# Altium PCB current-meter.PcbDoc
Units mm, origin at the board's own origin, x right, y up, seen from the top; angles counter-clockwise.
Board outline 51 x 16 mm, 2 copper layers (Top Layer, Bottom Layer), stack 1.471 mm thick; 53 components, 33 nets, 187 pads, 76 vias.
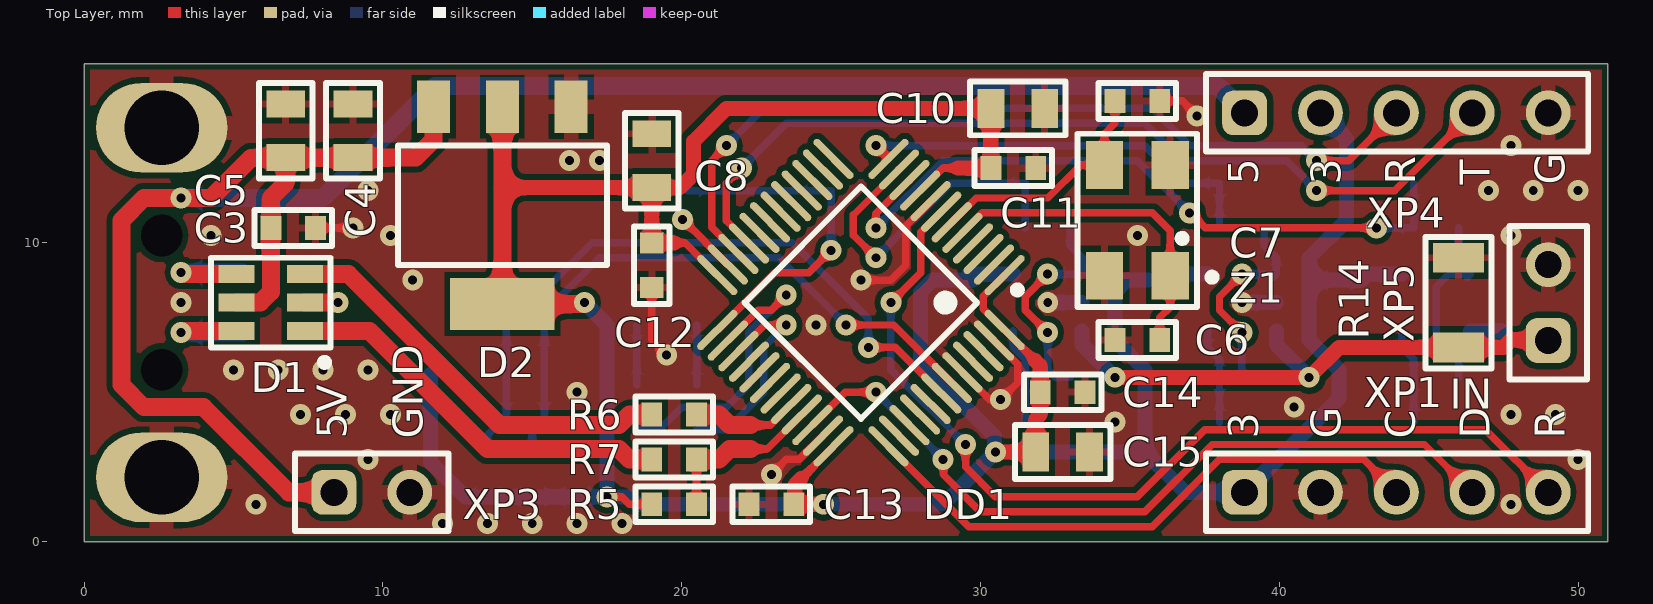
[diagram p0: Top Layer view]
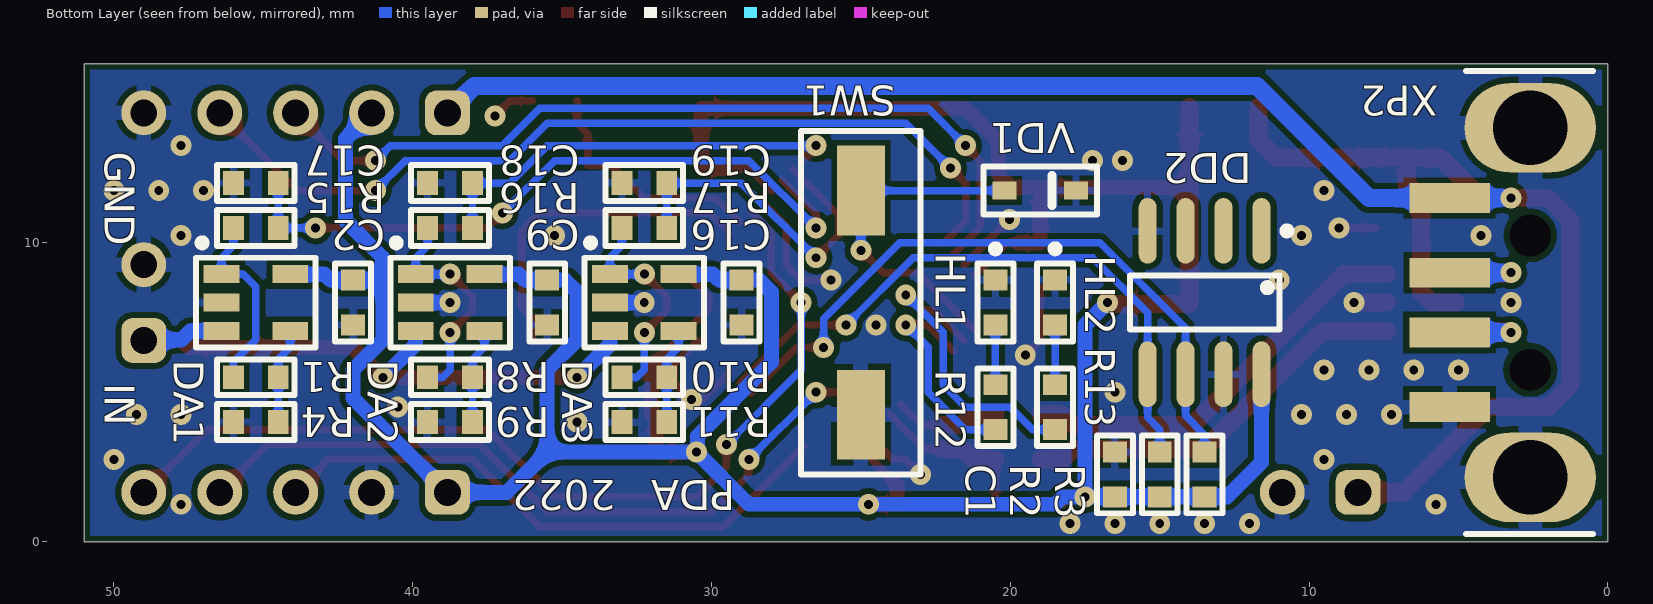
[diagram p1: Bottom Layer view, seen from below]
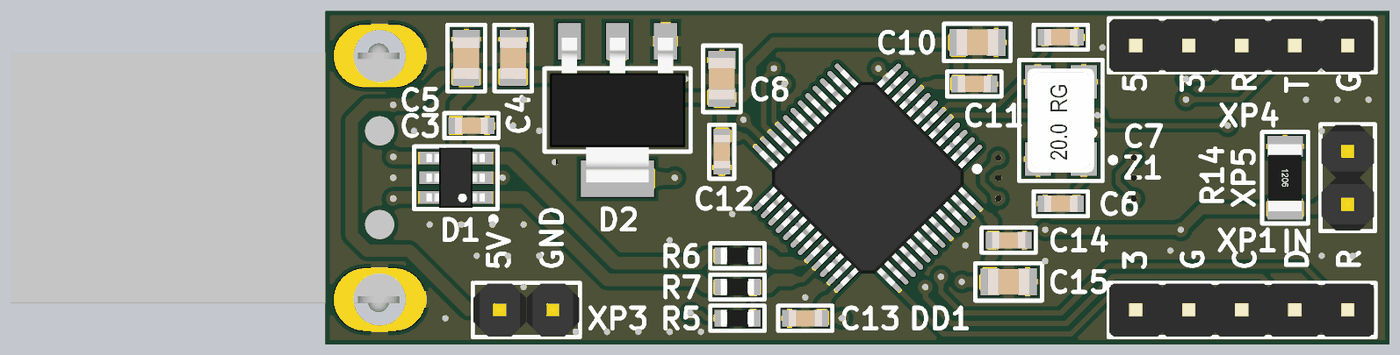
[diagram p2: 3D render of the assembled board from above, using the file's embedded part models]
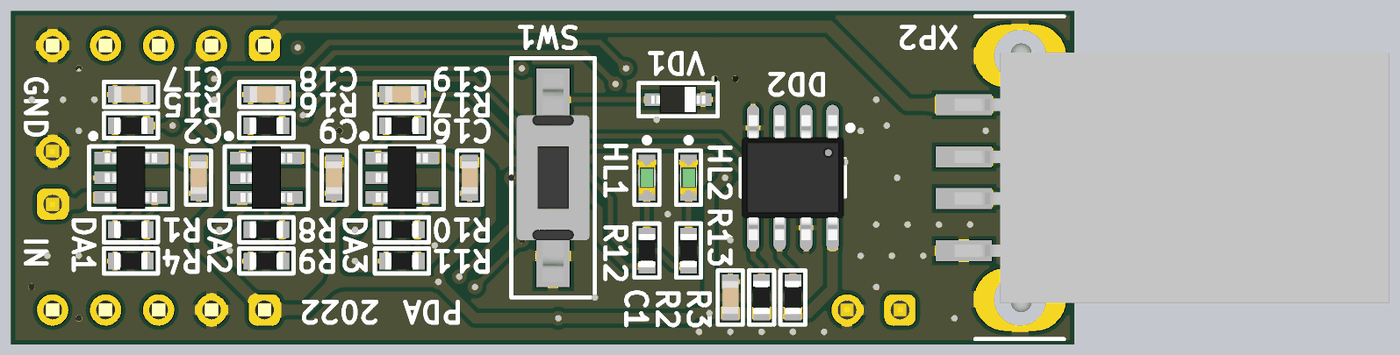
[diagram p3: 3D render of the assembled board from below, using the file's embedded part models]

## Layer stack, top to bottom
Top Solder: solder mask 0.0102, Solder Resist, Dk 3.5
Top Layer: signal copper 0.0356
Dielectric 1: dielectric 1.4, FR-4, Dk 4.8
Bottom Layer: signal copper 0.0356
Bottom Solder: solder mask 0.0102, Solder Resist, Dk 3.5

## Board outline
0,0 51,0 51,16 0,16

## Design rules (kind name [scope] priority, off if disabled: settings)
BoardOutlineClearance [All] p1: gap=0.2 ignorepadtopadclearanceinfootprint=FALSE
Clearance Clearance_r [(ObjectKind = 'Pad') And (AsMM(SolderMaskExpansion) = 1)] p1: gap=1 ignorepadtopadclearanceinfootprint=FALSE
Clearance [All] p2: gap=0.2 ignorepadtopadclearanceinfootprint=FALSE
ComponentClearance ComponentClearance_pls [(ObjectKind = 'Component') And (Footprint = 'PLS-5')] p1: gap=0 collisioncheckmode=3 verticalgap=0 showdistances=FALSE
ComponentClearance ComponentClearance_panel [(ObjectKind = '3D Body') And ((Identifier = 'panel_front') Or (Identifier = 'panel_back'))] p2: gap=0 collisioncheckmode=3 verticalgap=0 showdistances=FALSE
ComponentClearance [All] p3: gap=0.2 collisioncheckmode=3 verticalgap=0.2 showdistances=FALSE
HoleSize [All] p1: absolutevalues=TRUE maxlimit=10 minlimit=0.3 maxpercent=80.000 minpercent=20.000
MinimumSolderMaskSliver [All] p1: minsoldermaskwidth=0.15
PolygonConnect PolygonConnect_0mm5 [(ObjectKind = 'Pad') And ((AsMM(PadXSize_AllLayers) = 2.7) Or (AsMM(PadXSize_AllLayers) = 1.5) Or (AsMM(PadYSize_AllLayers) = 1.75) Or (AsMM(PadYSize_AllLayers) = 3))] p1: connectstyle=Relief reliefconductorwidth=0.5 reliefentries=4 polygonreliefangle="90 Angle" airgapwidth=0.2
PolygonConnect PolygonConnect_0mm8 [(ObjectKind = 'Pad') And (AsMM(PadXSize_AllLayers) = 3)] p2: connectstyle=Relief reliefconductorwidth=0.8 reliefentries=4 polygonreliefangle="90 Angle" airgapwidth=0.2
PolygonConnect PolygonConnect_via [IsVia] p3: connectstyle=Direct reliefconductorwidth=0.254 reliefentries=4 polygonreliefangle="90 Angle" airgapwidth=0.254
PolygonConnect [All] p4: connectstyle=Relief reliefconductorwidth=0.25 reliefentries=4 polygonreliefangle="90 Angle" airgapwidth=0.2
RoutingVias [All] p1: holewidth=0.3 width=0.7 viastyle="Through Hole" minholewidth=0.3 minwidth=0.6 maxholewidth=0.5 maxwidth=1
SolderMaskExpansion [All] p1: expansion=0.05 istentingtop=FALSE
Width [All] p1: maxlimit=5 minlimit=0.2 preferedwidth=0.2
27 further rules are at their usual default settings.

## Components (designator, comment, footprint, x,y, rotation, side; value= is the part's Value field where it differs from the comment)
C1 "0.1u" 0603-CAP 16.5,2.25 r90 bottom
C2 "0.1u" 0603-CAP 42,8 r90 bottom
C3 "0.1u" 0603-CAP 7,10.5 r0 top
C4 "4.7u" 0805-CAP 9,13.75 r90 top
C5 "4.7u" 0805-CAP 6.75,13.75 r90 top
C6 "22p" 0603-CAP 35.25,6.75 r180 top
C7 "22p" 0603-CAP 35.25,14.75 r0 top
C8 "1u" 0805-CAP 19,12.75 r90 top
C9 "0.1u" 0603-CAP 35.5,8 r90 bottom
C10 "1u" 0805-CAP 31.25,14.5 r180 top
C11 "0.01u" 0603-CAP 31.1,12.5 r180 top
C12 "0.1u" 0603-CAP 19,9.25 r90 top
C13 "0.1u" 0603-CAP 23,1.25 r0 top
C14 "0.1u" 0603-CAP 32.75,5 r180 top
C15 "4.7u" 0805-CAP 32.75,3 r180 top
C16 "0.1u" 0603-CAP 29,8 r90 bottom
C17 "0.1u" 0603-CAP 45.25,12 r0 bottom
C18 "0.1u" 0603-CAP 38.75,12 r0 bottom
C19 "0.1u" 0603-CAP 32.25,12 r0 bottom
D1 "USBLC6-2SC6" SOT-23-6L 6.25,8 r180 top
D2 "AZ1117EH-3.3" SOT-223 14,11.25 r180 top
DA1 "OPA333" SOT-23-5 45.25,8 r180 bottom
DA2 "OPA333" SOT-23-5 38.75,8 r180 bottom
DA3 "OPA333" SOT-23-5 32.25,8 r180 bottom
DD1 "STM32F103C8T6" LQFP48 26,8 r225 top
DD2 "M24C16-WMN6TP" SOIC8 13.5,8 r270 bottom
HL1 "LED" 0603-LED 20.5,8 r90 bottom
HL2 "LED" 0603-LED 18.5,8 r90 bottom
R1 "39k" 0603-RES 45.25,5.5 r0 bottom
R2 "10k" 0603-RES 15,2.25 r90 bottom
R3 "10k" 0603-RES 13.5,2.25 r90 bottom
R4 "100" 0603-RES 45.25,4 r180 bottom
R5 "1.5k" 0603-RES 19.75,1.25 r180 top
R6 "22" 0603-RES 19.75,4.25 r180 top
R7 "22" 0603-RES 19.75,2.75 r180 top
R8 "39k" 0603-RES 38.75,5.5 r0 bottom
R9 "1k" 0603-RES 38.75,4 r180 bottom
R10 "0" 0603-RES 32.25,5.5 r0 bottom
R11 "NP" 0603-RES 32.25,4 r180 bottom
R12 "1k" 0603-RES 20.5,4.5 r270 bottom
R13 "1k" 0603-RES 18.5,4.5 r270 bottom
R14 "1" 1206-RES 46,8 r270 top
R15 "1k" 0603-RES 45.25,10.5 r0 bottom
R16 "1k" 0603-RES 38.75,10.5 r0 bottom
R17 "1k" 0603-RES 32.25,10.5 r0 bottom
SW1 "PARTNUMBER" KLS7-TS3608-5.0-180 25,8 r90 bottom
VD1 "PESD5V0L1BA" SOD-323 19,11.75 r180 bottom
XP1 "SWD" PLS-5 38.84,1.65 r0 top
XP2 "USB type A" DS1098-B 0,8 r270 bottom
XP3 "NO POP" PLS-2 8.36,1.65 r0 top
XP4 "PLS-5" PLS-5 38.84,14.35 r0 top
XP5 "NO POP" PLS-2 49,6.73 r90 top
Z1 "8MHz" KX-9 35.25,10.75 r90 top

## Footprints (in the part's own frame and the unit in brackets; to place one, negate y for a bottom-side part, rotate by r counter-clockwise, add the part's x,y. Pads: shape width x height; smd on the part's side, far side on the other; paste and mask are expansions set on the pad)
0603-CAP [mm]
  rect 0.7x0.8 smd: 1(-0.75,0) 2(0.75,0)
  silkscreen extent -1.3,-0.6 1.3,0.6, body extent -0.8,-0.4 0.8,0.4, height 0.8
0603-LED [mm]
  rect 0.7x0.8 smd: 1(-0.75,0) 2(0.75,0)
  silkscreen extent -1.3,-0.6 1.92,0.6, body extent -0.8,-0.4 0.8,0.4, height 0.6
0603-RES [mm]
  rect 0.7x0.8 smd: 1(-0.75,0) 2(0.75,0)
  silkscreen extent -1.3,-0.6 1.3,0.6, body extent -0.8,-0.4 0.8,0.4, height 0.46
0805-CAP [mm]
  rect 0.9x1.3 smd: 1(-0.9,0) 2(0.9,0)
  silkscreen extent -1.6,-0.9 1.6,0.9, body extent -1,-0.62 1,0.62, height 0.7
1206-RES [mm]
  rect 1x1.7 smd: 1(-1.5,0) 2(1.5,0)
  silkscreen extent -2.2,-1.1 2.2,1.1, body extent -1.6,-0.8 1.6,0.8, height 0.6
DS1098-B [mm] "USB"
  rect 1x2.7 smd: 1(-3.5,-5.3) 2(-1,-5.3) 3(1,-5.3) 4(3.5,-5.3)
  oval 3x4.4 hole 2.5: 4(-5.85,-2.6) 4(5.85,-2.6)
  round 1 hole 1.4 unplated: ""(-2.25,-2.6) ""(2.25,-2.6)
  silkscreen extent -7.75,-4.75 7.75,-0.5, body extent -6.45,-5.75 6.45,15.1, height 3.25
KLS7-TS3608-5.0-180 [mm] "Button"
  rect 3x1.6 smd: 1(-3.75,0) 2(3.75,0)
  silkscreen extent -5.75,-2 5.75,2, body extent -5,-1.75 5,1.75, height 5
KX-9 [mm]
  rect 1.6x1.25 smd: 1(-1.85,-1.1) 2(1.85,-1.1) 3(1.85,1.1) 4(-1.85,1.1)
  silkscreen extent -2.9,-2.63 2.9,2, body extent -2.5,-1.6 2.5,1.6, height 1.01
LQFP48 [mm]
  oval 1.8x0.25 smd: 1(-4.05,2.75) 2(-4.05,2.25) 3(-4.05,1.75) 4(-4.05,1.25) 5(-4.05,0.75) 6(-4.05,0.25) 7(-4.05,-0.25) 8(-4.05,-0.75) 9(-4.05,-1.25) 10(-4.05,-1.75) 11(-4.05,-2.25) 12(-4.05,-2.75) 25(4.05,-2.75) 26(4.05,-2.25) 27(4.05,-1.75) 28(4.05,-1.25) 29(4.05,-0.75) 30(4.05,-0.25) 31(4.05,0.25) 32(4.05,0.75) 33(4.05,1.25) 34(4.05,1.75) 35(4.05,2.25) 36(4.05,2.75)
  oval 0.25x1.8 smd: 13(-2.75,-4.05) 14(-2.25,-4.05) 15(-1.75,-4.05) 16(-1.25,-4.05) 17(-0.75,-4.05) 18(-0.25,-4.05) 19(0.25,-4.05) 20(0.75,-4.05) 21(1.25,-4.05) 22(1.75,-4.05) 23(2.25,-4.05) 24(2.75,-4.05) 37(2.75,4.05) 38(2.25,4.05) 39(1.75,4.05) 40(1.25,4.05) 41(0.75,4.05) 42(0.25,4.05) 43(-0.25,4.05) 44(-0.75,4.05) 45(-1.25,4.05) 46(-1.75,4.05) 47(-2.25,4.05) 48(-2.75,4.05)
  silkscreen extent -4.12,-2.75 2.75,3.52, body extent -4.5,-4.5 4.5,4.5, height 1.6
PLS-2 [mm]
  rrect50% 1.5x1.5 hole 0.9: 1(0,0)
  round 1.5 hole 0.9: 2(2.54,0)
  silkscreen extent -1.3,-1.3 3.84,1.3, body extent -1.27,-1.27 3.81,1.27, height 8.54
PLS-5 [mm]
  rrect50% 1.5x1.5 hole 0.9: 1(0,0)
  round 1.5 hole 0.9: 2(2.54,0) 3(5.08,0) 4(7.62,0) 5(10.16,0)
  silkscreen extent -1.3,-1.3 11.5,1.3, body extent -1.27,-1.27 11.43,1.27, height 8.54
SOD-323 [mm]
  rect 0.8x0.6 smd: 1(-1.2,0) 2(1.2,0)
  silkscreen extent -1.9,-0.8 1.9,0.8, body extent -1.3,-0.67 1.3,0.68, height 1.1
SOIC8 [mm]
  oval 2.2x0.6 smd: 1(-2.4,1.905) 2(-2.4,0.635) 3(-2.4,-0.635) 4(-2.4,-1.905) 5(2.4,-1.905) 6(2.4,-0.635) 7(2.4,0.635) 8(2.4,1.905)
  silkscreen extent -2.52,-2.5 0.9,2.88, body extent -3,-2.45 3,2.45, height 1.7
SOT-23-5 [mm]
  rect 1.2x0.6 smd: 1(-1.15,0.95) 2(-1.15,0) 3(-1.15,-0.95) 4(1.15,-0.95) 5(1.15,0.95)
  silkscreen extent -2,-1.5 2,2.12, body extent -1.25,-1.5 1.25,1.5, height 1.1
SOT-23-6L [mm]
  rect 1.2x0.6 smd: 1(-1.15,0.95) 2(-1.15,0) 3(-1.15,-0.95) 4(1.15,-0.95) 5(1.15,0) 6(1.15,0.95)
  silkscreen extent -2,-1.5 2,2.12, body extent -1.4,-1.45 1.4,1.45, height 1.45
SOT-223 [mm]
  rect 1.1x1.75 smd: 1(-2.3,-3.3) 2(0,-3.3) 3(2.3,-3.3)
  rect 3.5x1.75 smd: 4(0,3.3)
  silkscreen extent -3.5,-2 3.5,2, body extent -3.25,-3.48 3.25,3.48, height 1.7

## Part data
C1 C2 C3 C4 C5 C6 C7 C8 C9 C10 C11 C12 C13 C14 C15 C16 C17 C18 C19: library part Cap, "PARTNUMBER"
D2: "AZ1117EH-3.3TRG1"
DA1 DA2 DA3: "OPA333AIDBVR (TS321ILT)"
HL1 HL2: library part LED0, "PARTNUMBER"
R1 R2 R3 R4 R5 R6 R7 R8 R9 R10 R11 R12 R13 R14 R15 R16 R17: library part Res2, "PARTNUMBER"
SW1: library part SW-PB
VD1: library part "TVS diode", "PESD5V0L1BA,115"
XP1 XP4: library part "Header 5", "PARTNUMBER"
XP2: library part "Header 4", "PARTNUMBER"
XP3 XP5: library part "Header 2", "PLS-2", Type=PLS-2
Z1: library part KX-9AT, "12.89048 (12.89007 -20+70)"

## Via types
v1: diameter 0.7, hole 0.3, Top Layer to Bottom Layer, tented both sides, 76 vias

## Nets (pads, with @x,y where several pads share a name; then routed paths per layer and width w, separated by ;. In a path a pad name is that pad's centre, name@x,y a point inside that pad or via, vN(x,y) a via of type N, cw(c..) or ccw(c..) an arc to the next point about the centre after c; other vN are vias at no path point)
3V3: C1.1 C2.2 C8.1 C9.2 C10.2 C11.2 C12.2 C13.2 C14.2 C15.2 C16.2 D2.2 D2.4 DA1.5 DA2.5 DA3.5 DD1.1 DD1.9 DD1.24 DD1.36 DD1.48 DD2.8 R2.1 R3.1 R5.2 XP1.1 XP4.2 | length 126.3
  Top Layer w0.25: v1(17.5,1.5) 18,1.5 18.25,1.25 R5.2 ; 19.75,10 20.111,10 DD1.24 ; 24,2.111 DD1.36 ; DD1.9 28.732,12.5 29.25,12.5 ; DD1.1 30.1,8.211 30.1,7.789 31.356,6.533 31.82,6.07
  Top Layer w0.5: 14,11.85 C8.1 ; 19.75,10 C12.2 C8.1 ; 24,2.111 23.789,1.9 23.789,1.289 C13.2 v1(24.75,1.25) ; 29.25,12.5 C11.2 C10.2 21.5,14.5 20.4,13.4 20.4,12.3 19.95,11.85 C8.1 ; v1(30.5,3) C15.2 31.85,4.1 32,4.25 C14.2 32,5.889 31.82,6.07
  Top Layer w0.6: D2.2 14,11.85 D2.4 v1@16.75,7.95
  Bottom Layer w0.5: DD2.8 11.595,2.655 12.75,1.5 R3.1 R2.1 C1.1 v1(17.5,1.5) ; v1(16.75,8) 17.5,7.25 v1(17.5,1.5) ; DA3.5 29.95,8.95 29.75,8.75 C16.2 28.393,8.75 28,8.357 28,6 30.472,3.528 30.472,3.028 v1(30.5,3) ; DA2.5 36.45,8.95 36.25,8.75 C9.2 34.893,8.75 34.5,8.357 34.5,6.75 35.5,5.75 35.5,3 ; XP1.1 36.85,1.65 35.5,3 ; XP1.1@38.85,1.65 42,4.8 42,5.75 41,6.75 41,8.75 ; XP4.2 42.25,13.48 42.25,10.75 41,9.5 41,8.75 ; DA1.5 42.95,8.95 42.75,8.75 C2.2 41,8.75 ; v1(17.5,1.5) 18.25,1.5 18.5,1.25 v1(24.75,1.25) 28.75,1.25 v1(30.5,3) ; v1(30.5,3) 35.5,3
5V: C3.1 C4.1 C5.1 D1.5 D2.3 XP2.1 XP3.1 XP4.1 | length 70.3
  Top Layer w0.6: D1.5 5.899,8 6.25,8.351 C3.1 6.25,11.5 6.75,12 C5.1 ; XP3.1 6.85,1.65 4,4.5 2,4.5 1.25,5.25 1.25,10.75 2,11.5 v1(3.25,11.5) 4.25,11.5 5.589,12.839 6.539,12.839 6.55,12.85 C5.1 ; D2.3 11.7,13.45 11.1,12.85 C4.1 C5.1
  Bottom Layer w0.6: v1(3.25,11.5) XP2.1 8,11.5 11.75,15.25 37.94,15.25 XP4.1
BUTTON: DD1.25 SW1.2 VD1.1 | length 11.7
  Top Layer w0.25: DD1.25 23.111,9 24.25,9 v1(25,9.75)
  Bottom Layer w0.25: VD1.1 SW1.2 v1(25,9.75)
C_INPUT: DA1.3 DA2.3 DA3.3 R14.2 XP5.1 | length 21.8
  Top Layer w0.5: v1(34.5,5.5) v1(41,5.5) 42,6.5 R14.2 47.5,6.5 47.75,6.75 48.98,6.75 XP5.1
  Bottom Layer w0.5: DA3.3 33.4,6.6 v1(34.5,5.5) ; DA2.3 39.9,6.6 v1(41,5.5) ; DA1.3 47.45,7.05 47.75,6.75 48.98,6.75 XP5.1
C_K1: C19.1 DD1.11 R17.1 | length 11.4
  Top Layer w0.25: v1(26.5,9.5) 25.75,10.25 25.75,10.932 DD1.11
  Bottom Layer w0.25: v1(26.5,9.5) 29,12 C19.1 R17.1
C_K40: C18.1 DD1.12 R16.1 | length 14.1
  Top Layer w0.25: v1(26.5,13.25) 26.93,12.82 DD1.12
  Bottom Layer w0.25: v1(26.5,13.25) 35.5,13.25 36.75,12 C18.1 R16.1
C_K400: C17.1 DD1.10 R15.1 | length 23.4
  Top Layer w0.25: v1(26.5,10.5) 26.5,10.975 DD1.10 ; v1(37,11) 37.025,11 37.525,10.5 v1(43.25,10.5)
  Bottom Layer w0.25: v1(26.5,10.5) 28.75,12.75 35.25,12.75 v1(37,11) ; v1(43.25,10.5) R15.1 C17.1
GND: C1.2 C2.1 C3.2 C4.2 C5.2 C6.2 C7.2 C8.2 C9.1 C10.1 C11.1 C12.1 C13.1 C14.1 C15.1 C16.1 C17.2 C18.2 C19.2 D1.2 D2.1 DA1.2 DA2.2 DA3.2 DD1.8 DD1.23 DD1.35 DD1.44 DD1.47 DD2.4 DD2.7 HL1.2 HL2.2 R4.1 R9.1 R11.1 R14.1 SW1.1 VD1.2 XP1.2 XP2.4 XP3.2 XP4.5 XP5.2 Z1.2 Z1.4 | length 21.5
  Top Layer w0.25: C3.2 v1(9,10.5) ; C12.1 19,6.75 v1(19.5,6.25) ; v1(20.034,10.784) DD1.23 ; v1(23,2.25) 23.5,2.75 23.932,2.75 DD1.35 ; v1(26,8.75) 27,8.75 27.5,9.25 27.5,10.561 DD1.8 ; DD1.44 30.311,4.75 v1(30.675,4.75) ; DD1.47 31.25,5.932 31.25,5.325 v1(30.675,4.75) ; v1@30.607,4.818 v1(30.675,4.75) ; C7.2 36.75,14.75 v1(37.25,14.25)
  Top Layer w0.6: D1.2 v1(8.5,8)
  Bottom Layer w0.5: v1(32.252,7.998) v1(32.252,7.998) 33.399,7.999 DA3.2 ; v1@38.753,7.999 DA2.2@39.899,7.999
  other v1: 12,0.6 13.5,0.6 15,0.6 16.5,0.6 18,0.6 5.75,1.25 47.75,1.25 9.5,2.75 50,2.75 34.5,4 7.25,4.25 8.75,4.25 10.25,4.25 47.75,4.25 49.25,4.25 40.5,4.5 16.5,5 5,5.75 6.5,5.75 8,5.75 9.5,5.75 24.5,7.25 38.752,7.998 3.25,8 11,8.75 4.25,10.25 10.25,10.25 35.25,10.25 47.75,10.25 9.5,11.75 47,11.75 48.5,11.75 50,11.75 16.25,12.75 17.25,12.75 47.75,13.25
LED_1: DD1.27 R12.2 | length 7.3
  Top Layer w0.25: DD1.27 22.775,7.25 v1(23.5,7.25)
  Bottom Layer w0.25: R12.2 21.5,3.75 22.75,5 22.75,6.5 v1(23.5,7.25)
LED_2: DD1.26 R13.2 | length 10.5
  Top Layer w0.25: DD1.26 22.568,7.75 23,7.75 v1(23.5,8.25)
  Bottom Layer w0.25: R13.2 19.25,3.75 20,4.5 21.5,4.5 22.25,5.25 22.25,7 v1(23.5,8.25)
NetC6_1: C6.1 DD1.5 Z1.1 | length 11.3
  Top Layer w0.25: DD1.5 30.061,11 35.75,11 36.35,10.4 Z1.1 36.35,7.85 36,7.5 C6.1
NetC7_1: C7.1 DD1.6 Z1.3 | length 8.2
  Top Layer w0.25: DD1.6 29.854,11.5 32.25,11.5 33.35,12.6 Z1.3 34.15,13.65 34.5,14 C7.1
NetD1_1: D1.1 R7.2 | length 13.4
  Top Layer w0.6: D1.1 9.55,7.05 13.5,3.1 17.9,3.1 18.25,2.75 R7.2
NetD1_3: D1.3 R6.2 | length 13.8
  Top Layer w0.6: D1.3 8.85,8.95 13.9,3.9 17.9,3.9 18.25,4.25 R6.2
NetDA1_1: DA1.1 R1.2 R15.2 | length 6.5
  Bottom Layer w0.25: R1.2 46,6 45.25,6.75 45.25,8.525 45.675,8.95 DA1.1 ; R15.2 46,9.9 46.4,9.5 DA1.1 ; DA1.1@46.297,8.847 DA1.1
NetDA1_4: DA1.4 R1.1 R4.2 | length 3.2
  Bottom Layer w0.25: DA1.4 44.1,6.5 44.5,6.1 R1.1 R4.2
NetDA2_1: DA2.1 R8.2 R16.2 | length 7.7
  Top Layer w0.25: v1(38.75,7) 38,7.75 38,8.2 v1(38.75,8.95)
  Bottom Layer w0.25: v1(38.75,7) 38.75,5.75 39,5.5 R8.2 ; v1(38.75,8.95) DA2.1 ; R16.2 39.5,9.9 39.9,9.5 DA2.1 ; DA2.1@39.797,8.847 DA2.1
NetDA2_4: DA2.4 R8.1 R9.2 | length 3.2
  Bottom Layer w0.25: DA2.4 37.6,6.5 38,6.1 R8.1 R9.2
NetDA3_1: DA3.1 R10.2 R17.2 | length 7.7
  Top Layer w0.25: v1(32.25,7) 31.5,7.75 31.5,8.2 v1(32.25,8.95)
  Bottom Layer w0.25: v1(32.25,7) 32.25,5.75 32.5,5.5 R10.2 ; v1(32.25,8.95) DA3.1 ; R17.2 33,9.9 33.4,9.5 DA3.1 ; DA3.1@33.297,8.847 DA3.1
NetDA3_4: DA3.4 R10.1 R11.2 | length 3.2
  Bottom Layer w0.25: DA3.4 31.1,6.5 31.5,6.1 R10.1 R11.2
NetDD1_32: DD1.32 R6.1 | length 3.6
  Top Layer w0.25: 22.3,3.9 22.961,3.9 DD1.32
  Top Layer w0.6: R6.1 21.25,4.25 21.6,3.9 22.3,3.9
NetDD1_33: DD1.33 R5.1 R7.1 | length 5.6
  Top Layer w0.25: R5.1 R7.1 ; 22.3,3.1 22.868,3.1 DD1.33
  Top Layer w0.6: R7.1 21.25,2.75 21.6,3.1 22.3,3.1
NetHL1_1: HL1.1 R12.1 | length 2
  Bottom Layer w0.25: R12.1 HL1.1
NetHL2_1: HL2.1 R13.1 | length 2
  Bottom Layer w0.25: R13.1 HL2.1
NRST: DD1.7 XP1.5 | length 32
  Top Layer w0.25: v1(27,8) 28,9 28,10.354 DD1.7 ; v1(29.5,3.25) 29.5,2.5 30.5,1.5 35.25,1.5 37.5,3.75 46.9,3.75 XP1.5
  Bottom Layer w0.25: v1(27,8) 27,5.75 v1(29.5,3.25)
SCL: DD1.42 DD2.6 R3.2 | length 22.8
  Top Layer w0.25: v1(26.25,6.5) 27.146,6.5 DD1.42
  Bottom Layer w0.25: R3.2 13.504,3.004 13.504,3.579 14.135,4.21 DD2.6 14.135,7.135 17,10 23.705,10 26.25,7.455 v1(26.25,6.5)
SDA: DD1.43 DD2.5 R2.2 | length 21
  Top Layer w0.25: v1(25.5,7.25) 27.104,7.25 DD1.43
  Bottom Layer w0.25: R2.2 15,3.75 15.405,4.155 DD2.5 15.405,7.655 17.25,9.5 23.25,9.5 v1(25.5,7.25)
SWCLK: DD1.37 XP1.3 | length 19.5
  Top Layer w0.25: DD1.37 29.611,0.5 35.75,0.5 38,2.75 42.82,2.75 XP1.3
SWDIO: DD1.34 XP1.4 | length 26.1
  Top Layer w0.25: DD1.34 25.475,5 v1(26.5,5) ; v1(28.75,2.75) 28.763,2.737 28.763,2.237 30,1 35.5,1 37.75,3.25 44.86,3.25 XP1.4
  Bottom Layer w0.25: v1(26.5,5) v1(28.75,2.75)
UART_RX: DD1.22 XP4.3 | length 28.5
  Top Layer w0.25: v1(21.5,13.25) 21,12.75 21,10.525 DD1.22 ; v1(41.25,12.75) 42.32,12.75 XP4.3
  Bottom Layer w0.25: v1(21.5,13.25) 22.75,14.5 35.75,14.5 37,13.25 40.75,13.25 v1(41.25,12.75)
UART_TX: DD1.21 XP4.4 | length 30.1
  Top Layer w0.25: v1(22,12.5) 21.5,12 21.5,10.732 DD1.21 ; v1(41.25,11.75) 43.86,11.75 XP4.4
  Bottom Layer w0.25: v1(22,12.5) 23.5,14 35.5,14 36.75,12.75 40.25,12.75 v1(41.25,11.75)
USB_DM: D1.4 XP2.2 | length 3.9
  Top Layer w0.6: v1(3.25,9) 3.277,9 3.327,8.95 D1.4
  Bottom Layer w0.6: v1(3.25,9) XP2.2
USB_DP: D1.6 XP2.3 | length 3.9
  Top Layer w0.6: v1(3.25,7) 3.277,7 3.327,7.05 D1.6
  Bottom Layer w0.6: v1(3.25,7) XP2.3
pads on no net: DD1.2 DD1.3 DD1.4 DD1.13 DD1.14 DD1.15 DD1.16 DD1.17 DD1.18 DD1.19 DD1.20 DD1.28 DD1.29 DD1.30 DD1.31 DD1.38 DD1.39 DD1.40 DD1.41 DD1.45 DD1.46 DD2.1 DD2.2 DD2.3 XP2.

## Polygon pours and split planes (outlines as drawn)
GND on Top Layer "GND_L01_P000" (solid, pour order 0): 0,16 0,0 51,0 51,16
GND on Bottom Layer "GND_L02_P001" (solid, pour order 1): 0,16 0,0 51,0 51,16

## Silkscreen, mask and mechanical layers (free items; w line width, h text height)
Top Overlay:
  text "5" at 39.3,11.95 h1 r90
  text "3" at 42.05,11.95 h1 r90
  text "R" at 44.55,11.95 h1 r90
  text "T" at 47.05,11.95 h1 r90
  text "G" at 49.55,11.95 h1 r90
  text "IN" at 45.7,4.45 h1
  text "5V" at 8.8,3.45 h1 r90
  text "GND" at 11.34,3.45 h1 r90
  text "3" at 39.3,3.45 h1 r90
  text "G" at 42.05,3.45 h1 r90
  text "C" at 44.55,3.45 h1 r90
  text "D" at 47.05,3.45 h1 r90
  text "R" at 49.55,3.45 h1 r90
Bottom Overlay:
  text "GND" at 50.3,13.05 h1 r90
  text "IN" at 50.3,5.3 h1 r90
  text "PDA" at 29.2,2.05 h1 r180
  text "2022" at 33.2,2.05 h1 r180
Mechanical 2:
  the board outline again, w0.5
Mechanical 15:
  drawing of 243 lines, arcs and shapes, not listed